# Altium PCB PowerModule.PcbDoc
Units mil, origin at the board's own origin, x right, y up, seen from the top; angles counter-clockwise.
Board outline 6000 x 4000 mil, 2 copper layers (Top Layer, Bottom Layer); 13 components, 0 nets, 44 pads, 0 vias.
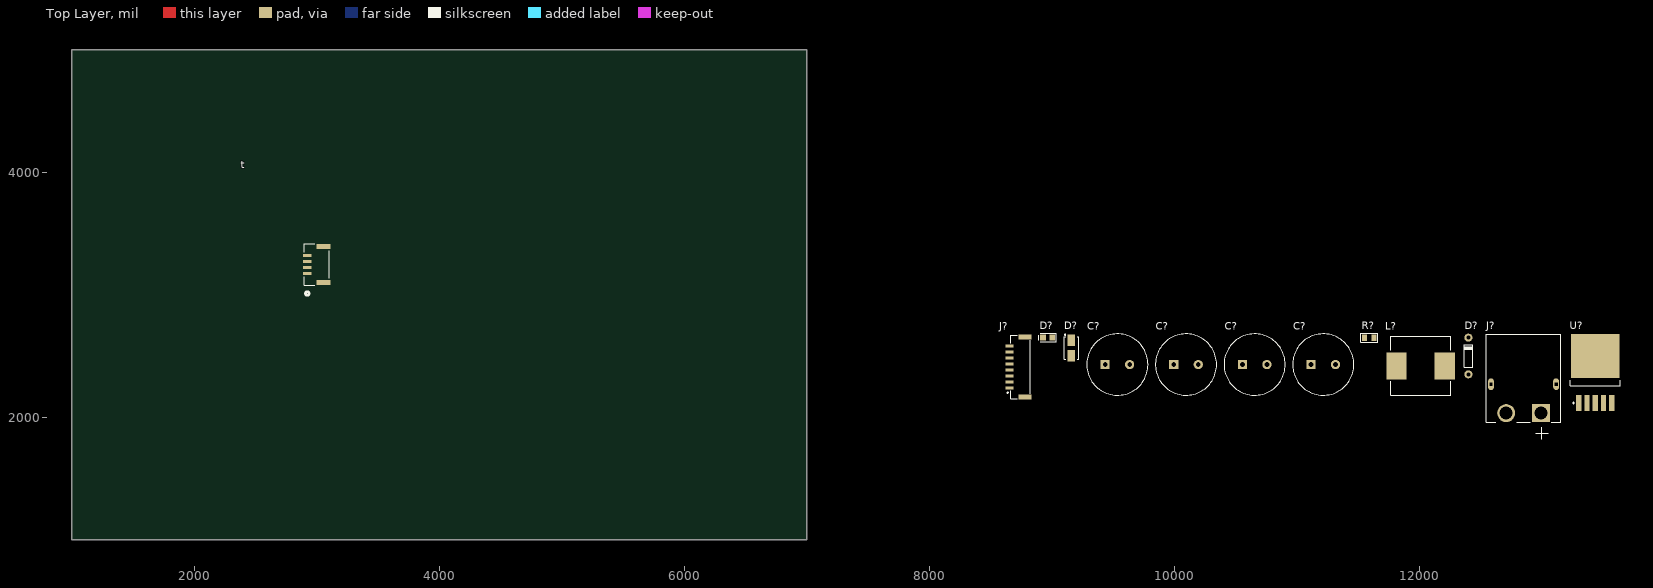
[diagram p0: Top Layer view]
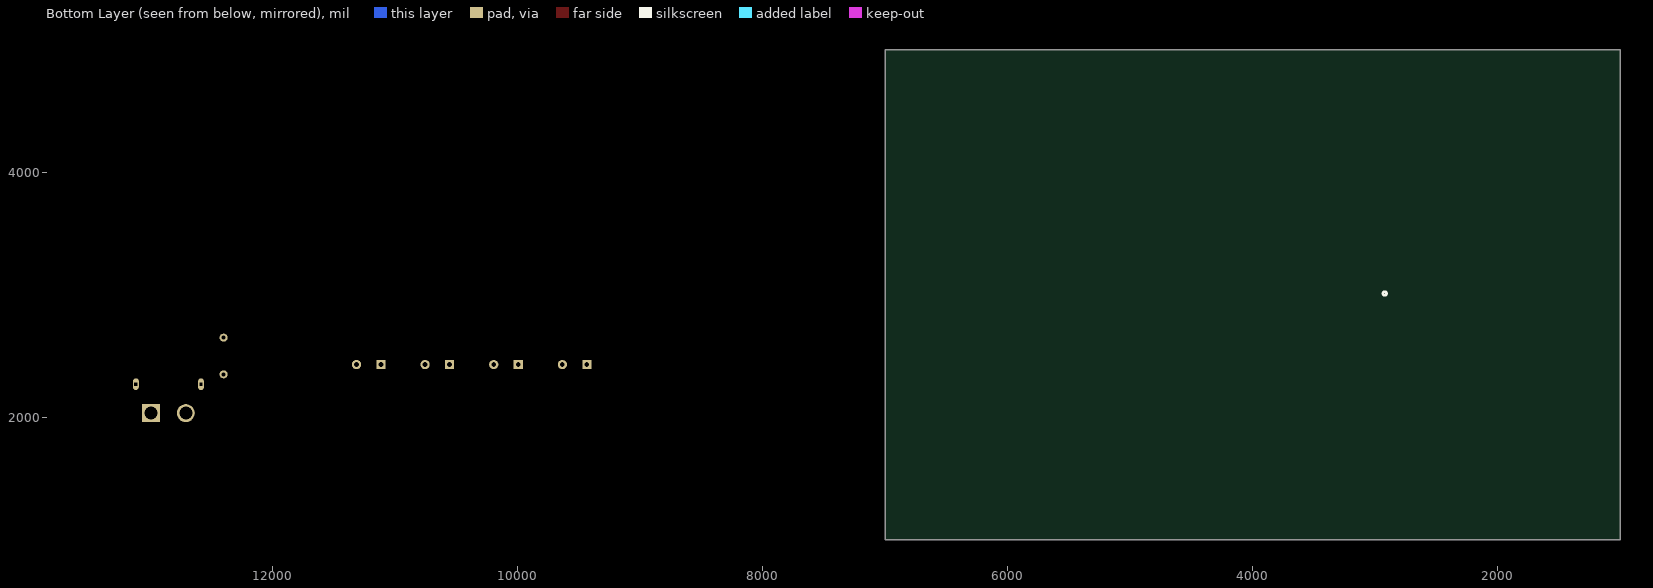
[diagram p1: Bottom Layer view, seen from below]

## Layer stack, top to bottom
Top Solder: solder mask 0.4, Solder Resist, Dk 3.5
Top Layer: signal copper 1.4
Dielectric 1: dielectric 12.6, FR-4, Dk 4.8
Bottom Layer: signal copper 1.4
Bottom Solder: solder mask 0.4, Solder Resist, Dk 3.5

## Board outline
1000,1000 7000,1000 7000,5000 1000,5000

## Design rules (kind name [scope] priority, off if disabled: settings)
Clearance [All] p1: gap=10 ignorepadtopadclearanceinfootprint=FALSE
PolygonConnect [All] p1: connectstyle=Relief reliefconductorwidth=10 reliefentries=4 polygonreliefangle="90 Angle" airgapwidth=10
RoutingVias [All] p1: holewidth=28 width=50 viastyle="Through Hole" minholewidth=28 minwidth=50 maxholewidth=28 maxwidth=50
SolderMaskExpansion [All] p1: expansion=4 istentingtop=FALSE
Width [All] p1: maxlimit=10 minlimit=10 preferedwidth=10
30 further rules are at their usual default settings.

## Classes and differential pairs
component class PowerModule: C? D? J? L? R? t U?

## Components (designator, comment, footprint, x,y, rotation, side; value= is the part's Value field where it differs from the comment)
C? "C" CYL/D.500/LS.200 9535,2430 r0 top
C? "C" CYL/D.500/LS.200 10655,2430 r0 top
C? "C" CYL/D.500/LS.200 10095,2430 r0 top
C? "C" CYL/D.500/LS.200 11215,2430 r0 top
D? "Diode" "DO-35 (SOD27 )" 12400,2350 r90 top
D? "Led" "Led 0805 RED" 8965,2650 r0 top
D? "Diode Schottky" "DO-214AC (SMA)" 9160,2565 r90 top
J? "SM08B-GHS-TB(LF)(SN)" JST_SM08B-GHS-TB(LF)(SN) 8655,2410 r90 top
J? "XT60PW-M" AMASS_XT60PW-M 12850,2270 r0 top
L? "Inductor" "Inductor SMD 12x12x8" 12010,2420 r0 top
R? "R" "R 0805" 11590,2650 r0 top
t "BM04B-GHS-TBT" CONN_BM04B-GHS-TBT_JST 3000.93,3246.65 r90 top
U? "LM2596S-5.0" TO-263-5 13435,2365 r90 top

## Footprints (in the part's own frame and the unit in brackets; to place one, negate y for a bottom-side part, rotate by r counter-clockwise, add the part's x,y. Pads: shape width x height; smd on the part's side, far side on the other; paste and mask are expansions set on the pad)
AMASS_XT60PW-M [mm]
  rect 3.716x3.716 / inner round 3.716 / far side rect 3.716x3.716 hole 2.7: 1(3.6,-6)
  round 3.716 hole 2.7: 2(-3.6,-6)
  oval 1.2x2.4 hole 0.6 square: S1(6.75,0) S2(-6.75,0)
  silkscreen extent -7.75,-11.43 7.75,10.35, body extent -7.75,-7.85 7.75,10.35, height 8.4
CONN_BM04B-GHS-TBT_JST [mil]
  rect 26x67 smd: 1(-73.82,77.82) 2(-24.61,77.82) 3(24.61,77.82) 4(73.82,77.82)
  rect 43x114 smd: 5(-146.65,-54.07) 6(146.65,-54.07)
  silkscreen extent -252,-103 168,102, body extent -162,-84 162,111, height 159
CYL/D.500/LS.200 [mil]
  rect 75x75 hole 39: 1(-100,0)
  round 75 hole 39: 2(100,0)
  silkscreen extent -250,-250 250,250, body extent -256,-255 254,255, height 866
"DO-35 (SOD27 )" [mil]
  round 65 hole 34: 1(0,0) 2(300,0)
  silkscreen extent 60,-35 240,35, body extent -11,-38 311,38, height 78
"DO-214AC (SMA)" [mm] "Molded Diode, 2-Leads, Body 4.3x2.7mm, IPC Medium Density"
  rect 2.35x1.55 smd: 1(-1.6,0) 2(1.6,0)
  silkscreen extent -2.3,-1.5 2.89,1.5, body extent -2.6,-1.3 2.6,1.3, height 2.4
"Inductor SMD 12x12x8" [mm] "Precision Wire Wound Inductor, 2-Leads, Body 12.3x12.3mm, IPC Low Density"
  rect 4.2x5.6 smd: 1(-5,0) 2(5,0)
  silkscreen extent -6.2,-6.15 6.2,6.15, body extent -6.25,-6.25 6.25,6.25, height 8.01
JST_SM08B-GHS-TB(LF)(SN) [mm]
  rect 0.6x1.7 smd: 1(-4.375,0) 2(-3.125,0) 3(-1.875,0) 4(-0.625,0) 5(0.625,0) 6(1.875,0) 7(3.125,0) 8(4.375,0)
  rect 1x2.7 smd: SH1(-6.225,-3.2) SH2(6.225,-3.2)
  silkscreen extent -6.63,-4.3 6.63,0.5, body extent -6.63,-2.42 6.63,2.42, height 4.25
"Led 0805 RED" [mm] "Led SMD 0805"
  rect 1.2x1.3 smd: 1(-0.975,0) 2(0.975,0)
  silkscreen extent -1.78,-0.89 1.78,0.89, body extent -1.01,-0.63 1.01,0.62, height 1.1
"R 0805" [mm] "Chip Resistor, 2-Leads, Body 2.0x1.3mm, IPC Medium Density"
  rect 1.05x1.35 smd: 1(-0.975,0) 2(0.975,0)
  silkscreen extent -1.75,-0.92 1.75,0.92, body extent -1,-0.61 1,0.59, height 0.5
TO-263-5 [mm] "D2-PAK, 6-Pads, Body 8.9x10.4mm (max), IPC Medium Density"
  rect 3.25x1.1 smd: 1(-6.3,3.4) 2(-6.3,1.7) 3(-6.3,0) 4(-6.3,-1.7) 5(-6.3,-3.4)
  rect 9.1x10.1 smd: 6(3.4,0)
  silkscreen extent -6.42,-5.2 -1.55,5.2, body extent -7.56,-4.98 8.11,5.02, height 4.83

## Part data
C? C? C? C?: library part Capacitor, "Capacitor pol"
D?: "Default Diode"
D?: "Typical LED"
D?: "Schottky Diode"
J?: "Connector Header Surface Mount, Right Angle 8 position 0.049 (1.25mm)", PACKAGE=None, Check_prices=https://www.snapeda.com/parts/SM08B-GHS-TB(LF)(SN)/JST/view-part/?ref=eda, MF="JST Sales", MP=SM08B-GHS-TB(LF)(SN), SnapEDA_Link=https://www.snapeda.com/parts/SM08B-GHS-TB(LF)(SN)/JST/view-part/?ref=snap
J?: "Socket, DC supply, male, PIN: 2", PACKAGE=Package, Availability="Not in stock", Check_prices=https://www.snapeda.com/parts/XT60PW-M/AMASS/view-part/?ref=eda, MF=AMASS, MP=XT60PW-M, Price=None, SnapEDA_Link=https://www.snapeda.com/parts/XT60PW-M/AMASS/view-part/?ref=snap
R?: library part Resistor, "Resistor"
t: "Connector Header Surface Mount 4 position 0.049 (1.25mm)", PACKAGE=None, Check_prices=https://www.snapeda.com/parts/BM04B-GHS-TBT/JST+Sales+America+Inc./view-part/?ref=eda, MF="JST Sales", MP=BM04B-GHS-TBT, SnapEDA_Link=https://www.snapeda.com/parts/BM04B-GHS-TBT/JST+Sales+America+Inc./view-part/?ref=snap
U?: "Simple Switcher 3A Step-Down Voltage Regulator"

## Nets (pads, with @x,y where several pads share a name; then routed paths per layer and width w, separated by ;. In a path a pad name is that pad's centre, name@x,y a point inside that pad or via, vN(x,y) a via of type N, cw(c..) or ccw(c..) an arc to the next point about the centre after c; other vN are vias at no path point)
pads on no net: C?.1 C?.2 D?.1 D?.2 J?.1 J?.2 J?.3 J?.4 J?.5 J?.6 J?.7 J?.8 J?.S1 J?.S2 J?.SH1 J?.SH2 L?.1 L?.2 R?.1 R?.2 t.1 t.2 t.3 t.4 t.5 t.6 U?.1 U?.2 U?.3 U?.4 U?.5 U?.6

## Text inside footprints (layer, text, board x,y; h text height)
t: Mechanical 13 "Default Padstyle: RX26Y67D0T" at 3271.93,2647.65 h50 r90; Mechanical 13 "1st Mtg Padstyle: RX43Y114D0T" at 3346.93,2617.65 h50 r90; Mechanical 13 "2nd Mtg Padstyle: RX50Y100D40P" at 3421.93,2587.65 h50 r90; Mechanical 13 "3rd Mtg Padstyle: RX100Y50D40P" at 3496.93,2587.65 h50 r90; Mechanical 13 "Left Mtg Padstyle: RX50Y100D30P" at 3571.93,2579.65 h50 r90; Mechanical 13 "Right Mtg Padstyle: RX50Y100D30P" at 3646.93,2557.65 h50 r90; Mechanical 13 "Alt Padstyle 1: OX60Y90D30P" at 3721.93,2663.65 h50 r90; Mechanical 13 "Alt Padstyle 2: OX90Y60D30P" at 3796.93,2663.65 h50 r90; Mechanical 13 "0.049in/1.25mm" at 2784.93,3037.65 h25 r90; Mechanical 13 "0.293in/7.45mm" at 2559.93,3098.65 h25 r90; Mechanical 13 "0.325in/8.255mm" at 2459.93,3087.65 h25 r90; Mechanical 13 "0in/0mm" at 2935.93,3528.65 h25 r90; Mechanical 13 "-0.132in/-3.35mm" at 3001.93,2632.65 h25 r90; Mechanical 13 "0.02in/0.5mm" at 2925.93,2398.65 h25 r90; Mechanical 13 "0.195in/4.953mm" at 3012.93,2380.65 h25 r90